# Allegro board StepperNug OSE v1.brd
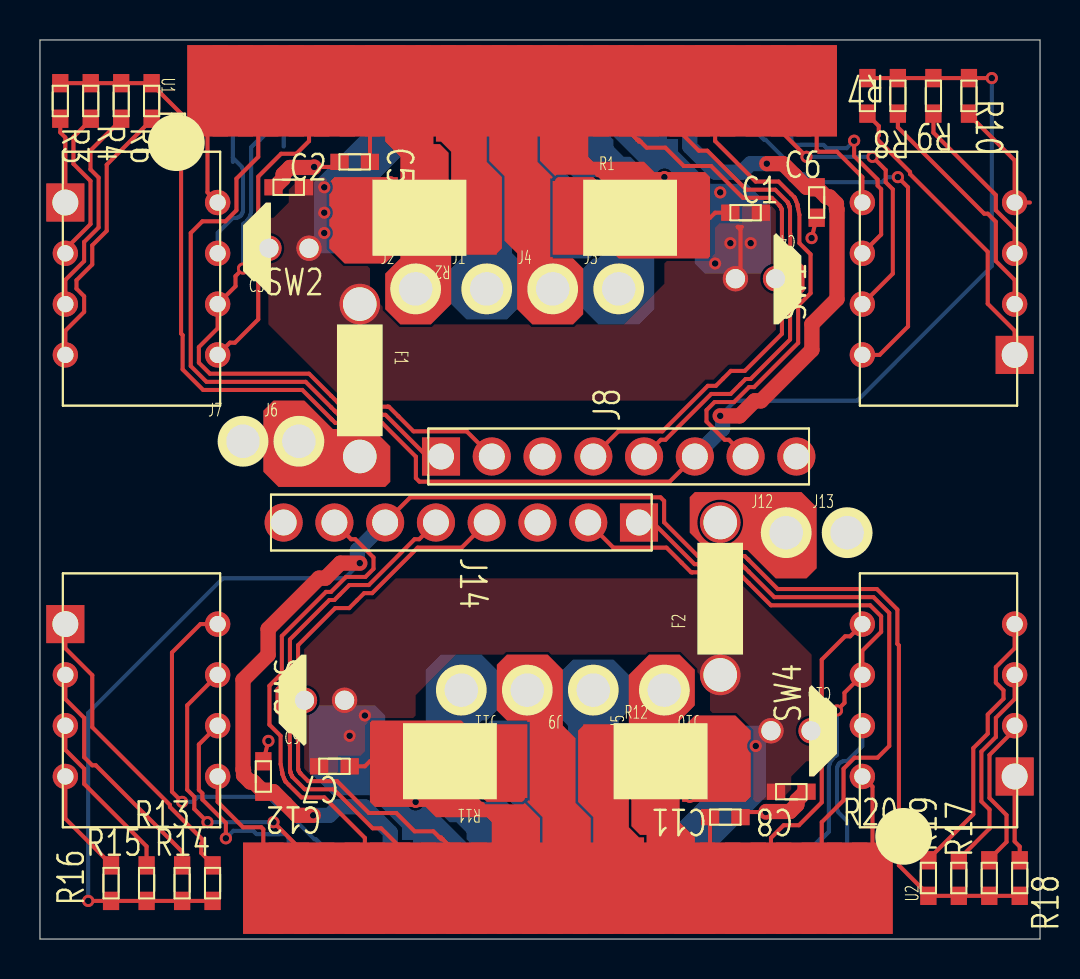
[diagram p0: board, top side]
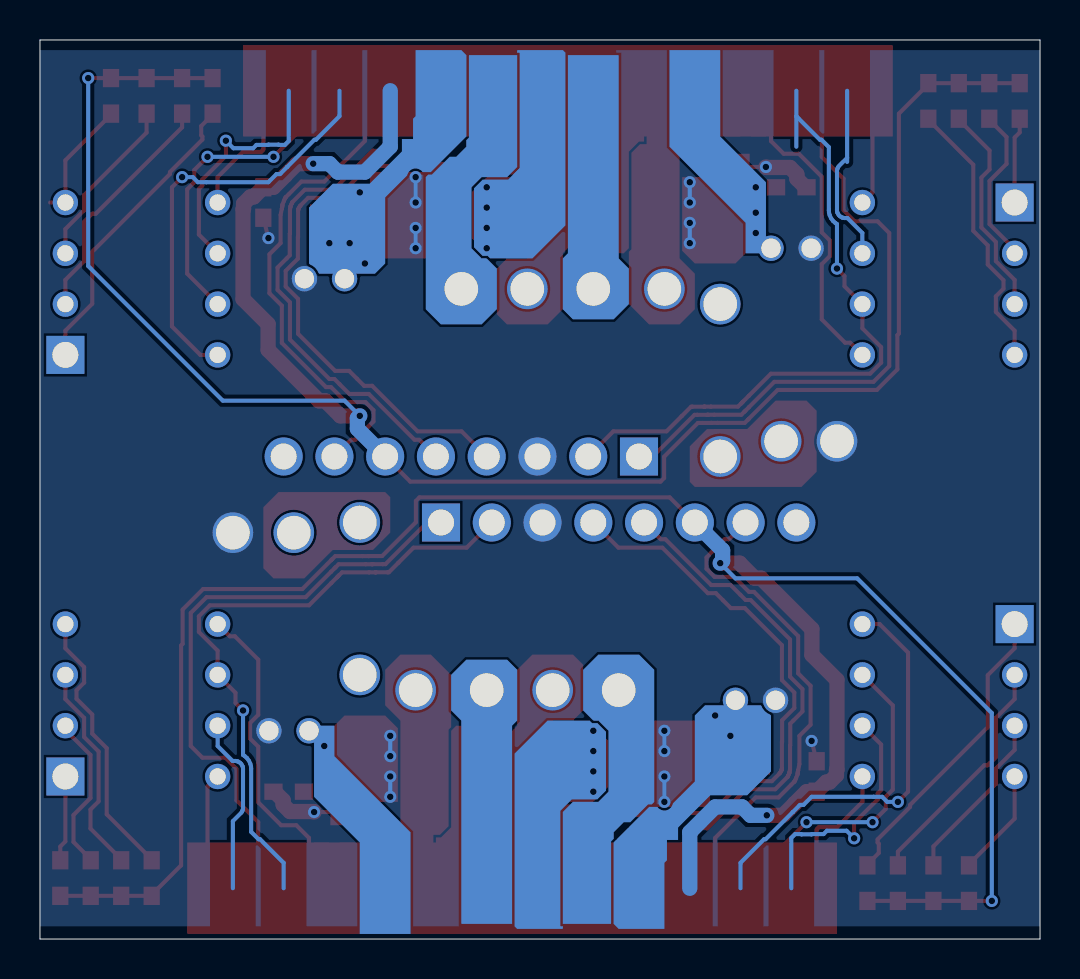
[diagram p1: board, bottom side, seen from below]

Outline 50.04 x 44.96 mm; copper layers: TOP, BOTTOM. Coordinates in mm from the lower left corner of the outline.
Outline path: 0,44.96 50.04,44.96 50.04,0 0,0 0,44.96

## Placement (name value [footprint] x y rotation side)
C1  1u  [SMD_0603_CAP]  35.31 36.32 0 top
C2  1u  [SMD_0603_CAP]  12.45 37.59 0 top
C3  47u  [THRU_ELECTRO]  12.45 34.54 0 top
C4  47u  [THRU_ELECTRO]  35.81 33.02 180 top
C5  330pf  [SMD_0603_CAP]  15.75 38.86 0 top
C6  2.2uf  [SMD_0603_CAP]  38.86 36.83 90 top
C7  1u  [SMD_0603_CAP]  14.73 8.64 180 top
C8  1u  [SMD_0603_CAP]  37.59 7.37 180 top
C9  47u  [THRU_ELECTRO]  14.22 11.94 0 top
C10  47u  [THRU_ELECTRO]  37.59 10.41 180 top
C11  330pf  [SMD_0603_CAP]  34.29 6.1 180 top
C12  2.2uf  [SMD_0603_CAP]  11.18 8.13 270 top
F1  FUSE  [THRU_FUSE]  16 27.94 270 top
F2  FUSE  [THRU_FUSE]  34.04 17.02 90 top
J1  Wiremount  [WIRE_HOLE]  22.35 32.51 0 top
J2  Wiremount  [WIRE_HOLE]  18.8 32.51 0 top
J3  Wiremount  [WIRE_HOLE]  28.96 32.51 0 top
J4  Wiremount  [WIRE_HOLE]  25.65 32.51 0 top
J5  Wiremount  [WIRE_HOLE]  27.69 12.45 180 top
J6  Wiremount  [WIRE_HOLE]  12.95 24.89 0 top
J7  Wiremount  [WIRE_HOLE]  10.16 24.89 0 top
J8  8 HEADER  [CONN_8SIP]  28.96 24.13 90 top
J9  Wiremount  [WIRE_HOLE]  24.38 12.45 180 top
J10  Wiremount  [WIRE_HOLE]  31.24 12.45 180 top
J11  Wiremount  [WIRE_HOLE]  21.08 12.45 180 top
J12  Wiremount  [WIRE_HOLE]  37.34 20.32 0 top
J13  Wiremount  [WIRE_HOLE]  40.39 20.32 0 top
J14  8 HEADER  [CONN_8SIP]  21.08 20.83 270 top
R1  0.166  [SMD_2512_RES]  26.42 36.07 0 top
R2  0.166  [SMD_2512_RES]  22.1 36.07 180 top
R3  1k  [SMD_0603_RES]  1.02 41.91 270 top
R4  1k  [SMD_0603_RES]  2.54 41.91 270 top
R5  1k  [SMD_0603_RES]  4.06 41.91 270 top
R6  1k  [SMD_0603_RES]  5.59 41.91 270 top
R7  1k  [SMD_0603_RES]  41.4 42.16 270 top
R8  1k  [SMD_0603_RES]  42.93 42.16 270 top
R9  1k  [SMD_0603_RES]  44.7 42.16 270 top
R10  1k  [SMD_0603_RES]  46.48 42.16 270 top
R11  0.166  [SMD_2512_RES]  23.62 8.89 180 top
R12  0.166  [SMD_2512_RES]  27.94 8.89 0 top
R13  1k  [SMD_0603_RES]  7.11 2.79 90 top
R14  1k  [SMD_0603_RES]  8.64 2.79 90 top
R15  1k  [SMD_0603_RES]  5.33 2.79 90 top
R16  1k  [SMD_0603_RES]  3.56 2.79 90 top
R17  1k  [SMD_0603_RES]  47.5 3.05 90 top
R18  1k  [SMD_0603_RES]  49.02 3.05 90 top
R19  1k  [SMD_0603_RES]  45.97 3.05 90 top
R20  1k  [SMD_0603_RES]  44.45 3.05 90 top
SW1  DipSw-4  [DIPSW-4]  44.96 33.02 180 top
SW2  DipSw-4  [DIPSW-4]  5.08 33.02 0 top
SW3  DipSw-4  [DIPSW-4]  5.08 11.94 0 top
SW4  DipSw-4  [DIPSW-4]  44.96 11.94 180 top
U1  TB6560AHQ  [HZIP_25_SMT]  8.38 42.42 0 top
U2  TB6560AHQ  [HZIP_25_SMT]  41.66 2.54 180 top

## Library data of the parts
C1 C2 C5-C8 C11 C12 = C
C3 C4 C9 C10 = C_elect_0
F1 F2 = FUSE_0
J1-J7 J9-J13 = Wiremount
J8 J14 = 8 HEADER
R1-R20 = R
SW1-SW4 = DipSw-4
U1 U2 = TB6560AHQ

## Footprints (pads in the part's own frame, mm; a bottom-side part is the same pattern mirrored in y, then rotated)
CONN_8SIP
  rect 1.905x1.905 hole 1.295: 1(0,8.89)
  round 1.905 hole 1.295: 2(0,6.35) 3(0,3.81) 4(0,1.27) 5(0,-1.27) 6(0,-3.81) 7(0,-6.35) 8(0,-8.89)
DIPSW-4
  rect 1.905x1.905 hole 1.295: 1(-3.81,3.81)
  round 1.27 hole 0.813: 2(-3.81,1.27) 3(-3.81,-1.27) 4(-3.81,-3.81) 5(3.81,-3.81) 6(3.81,-1.27) 7(3.81,1.27) 8(3.81,3.81)
HZIP_25_SMT
  rect 2.032x4.572 smd: 1(0,0) 2(1.27,0) 3(2.54,0) 4(3.81,0) 5(5.08,0) 6(6.35,0) 7(7.62,0) 8(8.89,0) 9(10.16,0) 10(11.43,0) 11(12.7,0) 12(13.97,0) 13(15.24,0) 14(16.51,0) 15(17.78,0) 16(19.05,0) 17(20.32,0) 18(21.59,0) 19(22.86,0) 20(24.13,0) 21(25.4,0) 22(26.67,0) 23(27.94,0) 24(29.21,0) 25(30.48,0)
SMD_0603_CAP
  rect 0.914x0.813 smd: 1(-0.762,0) 2(0.762,0)
SMD_0603_RES
  rect 0.914x0.813 smd: 1(-0.889,0) 2(0.889,0)
SMD_2512_RES
  rect 1.524x3.683 smd: 1(0,0) 2(6.223,0)
THRU_ELECTRO
  round 1.27 hole 0.965: 1(-0.991,0) 2(1.016,0)
THRU_FUSE
  round 2.032 hole 1.676: 1(-3.81,0) 2(3.81,0)
WIRE_HOLE
  round 2.032 hole 1.676: 1(0,0)

## Nets
VCC: C6.2 C12.2 J8.6 J14.6 R3.1 R4.1 R5.1 R6.1 R7.1 R8.1 R9.1 R10.1 R13.1 R14.1 R15.1 R16.1 R17.1 R18.1 R19.1 R20.1 U1.20(VDD) U2.20(VDD)
0: C1.1 C2.1 C3.1(-) C4.1(-) C5.1 C6.1 C7.1 C8.1 C9.1(-) C10.1(-) C11.1 C12.1 J7.1(.) J8.3 J13.1(.) J14.3 R1.2 R2.2 R11.2 R12.2 U1.6(SGND) U1.10(MOTGND#10) U1.15(MOTGND#15) U2.6(SGND) U2.10(MOTGND#10) U2.15(MOTGND#15)
VMOT: F1.2 F2.2 J6.1(.) J12.1(.)
N21631: R1.1 U1.14(A_CRNT_SNS)
N21711: J1.1(.) U1.12(OUT_BP)
N21715: J4.1(.) U1.13(OUT_AM)
N21719: J3.1(.) U1.16(OUT_AP)
N21723: J2.1(.) U1.9(OUT_BM)
N21813: C1.2 C2.2 C3.2(+) C4.2(+) F1.1 U1.8(VMB) U1.18(VMA)
N21925: J8.1 U1.3(CLK)
N21937: J8.7 U1.21(DIR)
N21949: J8.4 U1.17(MO)
N21961: J8.5 U1.19(PROTECT)
N22033: SW2.8(IN1) U1.1(TQ2)
N22045: SW2.7(IN2) U1.2(TQ1)
N22057: J8.2 SW2.6(IN3) U1.4(ENA)
N22069: SW2.5(IN4) U1.5(RES)
N22081: SW1.5(IN4) U1.25(DCY1)
N22089: SW1.8(IN1) U1.22(M2)
N22289: R7.2 SW1.1(TRM1)
N22293: R8.2 SW1.2(TRM2)
N22297: R9.2 SW1.3(TRM3)
N22301: R10.2 SW1.4(TRM4)
N22309: SW1.6(IN3) U1.24(DCY2)
N22321: SW1.7(IN2) U1.23(M1)
N23844: R11.1 U2.14(A_CRNT_SNS)
N23930: J5.1(.) U2.12(OUT_BP)
N23944: J9.1(.) U2.13(OUT_AM)
N23948: J11.1(.) U2.16(OUT_AP)
N23952: J10.1(.) U2.9(OUT_BM)
N24042: C7.2 C8.2 C9.2(+) C10.2(+) F2.1 U2.8(VMB) U2.18(VMA)
N24154: J14.1 U2.3(CLK)
N24166: J14.7 U2.21(DIR)
N24170: J14.4 U2.17(MO)
N24190: J14.5 U2.19(PROTECT)
N24262: SW4.8(IN1) U2.1(TQ2)
N24274: SW4.7(IN2) U2.2(TQ1)
N24286: J14.2 SW4.6(IN3) U2.4(ENA)
N24298: SW4.5(IN4) U2.5(RES)
N24310: SW3.5(IN4) U2.25(DCY1)
N24318: SW3.8(IN1) U2.22(M2)
N24518: R14.2 SW3.1(TRM1)
N24522: R13.2 SW3.2(TRM2)
N24526: R15.2 SW3.3(TRM3)
N24530: R16.2 SW3.4(TRM4)
N24538: SW3.6(IN3) U2.24(DCY2)
N24550: SW3.7(IN2) U2.23(M1)
N26771: R2.1 U1.11(B_CRNT_SNS)
N26877: R12.1 U2.11(B_CRNT_SNS)
N216076: C5.2 U1.7(OSC)
N221410: R3.2 SW2.1(TRM1)
N221411: R4.2 SW2.2(TRM2)
N221412: R5.2 SW2.3(TRM3)
N221413: R6.2 SW2.4(TRM4)
N238366: C11.2 U2.7(OSC)
N243700: R18.2 SW4.1(TRM1)
N243701: R17.2 SW4.2(TRM2)
N243702: R19.2 SW4.3(TRM3)
N243703: R20.2 SW4.4(TRM4)

Pads without a net: J8 8; J14 8

## Via types
v1: diameter 0.61, hole 0.33, TOP to BOTTOM, 54 vias

## Routing (per net, layer and track width the routed paths; a pad name or vN(x,y) marks a point on that pad's centre or on a via; arc(x,y) is an arc through that point)
VCC: length 218.2
  TOP w0.203: J14.6 18.53,22.09 31.05,22.09 31.23,21.91 31.23,20.84 32.92,19.15 33.15,19.15 33.55,19.15 33.56,19.15 33.59,19.15 33.91,19.15 33.91,19.15 35.26,19.15 35.41,19 35.46,18.95 36.91,17.5 41.87,17.5 42.9,16.47 42.9,14.76 42.98,14.68 42.98,3.68 44.45,2.21 R20.1 R19.1 R17.1 R18.1 ; 46.48,43 R10.1 ; R10.1 v1(47.62,43.05) ; R10.1 R9.1 R8.1 R7.1 ; v1(2.41,1.91) R16.1 R15.1 R13.1 R14.1 ; J8.6 31.51,22.87 18.99,22.87 18.81,23.05 18.81,24.12 17.12,25.81 16.89,25.81 16.48,25.81 16.48,25.81 16.45,25.81 16.13,25.81 16.13,25.81 14.78,25.81 14.63,25.96 14.57,26.01 13.13,27.46 8.16,27.46 7.14,28.48 7.14,30.2 7.06,30.28 7.06,41.28 5.59,42.75 R6.1 R5.1 R4.1 R3.1
  TOP w0.762: v1(16,18.8) 15.03,18.8 14.28,18.05 13.96,18.05 11.42,15.5 11.42,14.21 10.16,12.95 10.16,8.47 10.19,8.44 10.19,8.19 10.53,7.85 10.69,7.85 C12.2 11.68,7.37 12.27,6.78 12.27,6.78 12.86,6.19 v1(13.67,6.19) ; v1(36.37,38.77) 37.18,38.77 37.77,38.18 37.77,38.18 38.35,37.59 C6.2 39.34,37.11 39.51,37.11 39.85,36.77 39.85,36.51 39.88,36.49 39.88,32 38.62,30.75 38.62,29.46 36.08,26.91 35.76,26.91 35.01,26.16 v1(34.04,26.16)
  BOTTOM w0.203: v1(47.62,43.05) 47.62,33.66 40.89,26.92 34.8,26.92 v1(34.04,26.16) ; v1(16,18.8) 15.24,18.03 9.14,18.03 2.41,11.3 v1(2.41,1.91)
  BOTTOM w0.762: v1(16,18.8) 15.88,18.92 15.88,19.44 J14.6 ; U2.20 17.53,5.33 16.26,6.6 14.9,6.6 14.48,6.19 v1(13.67,6.19) ; J8.6 34.16,25.52 34.16,26.04 v1(34.04,26.16) ; U1.20 32.51,39.62 33.78,38.35 35.14,38.35 35.55,38.77 v1(36.37,38.77)
0: length 31.1
  TOP w0.203: C5.1 14.94,38.86 14.68,38.61 v1(13.72,38.61) ; v1(31.24,36.83) 31.24,35.66 ; 31.24,35.66 v1(31.24,35.56) v1(31.24,34.54) ; 31.24,35.66 31.65,36.07 R1.2 33.53,36.07 33.78,36.32 C1.1 ; C7.1 16.26,8.64 16.51,8.89 R11.2 18.39,8.89 18.8,9.3 ; C11.1 35.1,6.1 35.36,6.35 v1(36.32,6.35) ; v1(18.8,10.41) v1(18.8,9.4) ; C12.1 v1(11.43,9.91) ; C6.1 v1(38.61,35.05) ; v1(32.51,8.13) v1(32.51,9.14) ; v1(17.53,36.83) v1(17.53,35.81)
  TOP w0.762: v1(13.72,38.61) 13.69,38.58 12.51,38.58 12.17,38.24 12.17,38.02 11.74,37.59 C2.1 ; v1(36.32,6.35) 36.35,6.38 37.53,6.38 37.87,6.72 37.87,6.94 38.3,7.37 C8.1
  BOTTOM w0.203: v1(31.24,35.56) v1(31.24,34.54) ; v1(17.53,37.85) v1(17.53,36.83) ; v1(18.8,9.4) v1(18.8,10.41) ; v1(32.51,9.14) v1(32.51,10.16) ; v1(31.24,36.83) v1(31.24,38.1) ; v1(32.51,7.11) v1(32.51,8.13) ; v1(17.53,35.81) v1(17.53,34.8) ; v1(18.8,8.13) v1(18.8,6.86)
N21631: length 4.7
  TOP w0.203: v1(27.69,37.59) v1(27.69,36.58) 27.69,36.35 27.41,36.07 R1.1 ; v1(27.69,35.56) v1(27.69,34.54)
  BOTTOM w0.203: v1(27.69,36.58) v1(27.69,35.56)
N21813: length 8
  TOP w0.203: 35.05,33.27 35.05,35.47 34.91,35.61 35.13,35.61
  BOTTOM w0.203: C3.2 v1(14.22,35.31) 13.97,35.31 ; v1(33.78,33.78) 34.8,34.8 35.05,34.8 ; 36.32,36.32 C1.2 v1(34.54,34.8)
  vias: v1(14.22,37.59) v1(14.22,36.32) v1(34.04,37.34) v1(35.56,34.8)
N21925: length 30.2
  TOP w0.203: J8.1 19.37,24.13 17.29,26.21 17.14,26.21 17.14,26.21 16.65,26.21 16.65,26.21 16.61,26.21 16.61,26.22 16.3,26.22 14.95,26.22 14.8,26.37 14.79,26.37 14.74,26.42 14.57,26.59 13.29,27.86 8.33,27.86 7.54,28.65 7.54,35.31 8.13,35.89 9.28,35.89 9.83,36.44 9.83,38.02 10.92,39.12 U1.3
N21937: length 24.7
  TOP w0.203: U1.21 33.78,39.9 35.81,37.88 36.96,37.88 37.59,37.24 37.74,37.09 37.75,37.08 37.77,37.05 37.78,37.03 37.81,36.96 37.83,36.91 37.83,36.9 37.9,36.73 37.91,36.7 37.91,36.67 37.92,36.59 38,36.21 38,34.8 38.56,34.24 38.56,32.29 37.94,31.67 37.94,29.81 35.73,27.6 35.47,27.6 34.73,26.85 33.76,26.85 33.35,26.45 33.35,25.88 34.26,24.97 34.47,24.97 J8.7
N21949: length 30.6
  TOP w0.203: 29.88,39.97 29.97,39.88 30.05,39.88 ; 29.88,39.97 28.7,41.15 U1.17 ; 29.88,39.97 29.96,39.97 30.05,39.88 ; J8.4 28.94,25.39 31.14,25.39 33.42,27.66 33.82,27.66 34.18,28.02 34.57,28.41 35.27,28.41 37.12,30.27 37.12,32.01 37.74,32.63 37.74,33.41 37.13,34.02 37.13,35.1 37.12,35.11 37.12,36.44 37.12,36.45 37.12,36.45 37.11,36.5 37.11,36.51 37.08,36.57 37.04,36.63 37.02,36.65 37,36.68 37,36.68 36.62,37.07 35.17,37.07 33.58,38.66 32.21,38.66 31.29,39.57 30.35,39.57 30.05,39.88
N21961: length 26.4
  TOP w0.203: U1.19 31.24,41.15 32.97,39.42 33.39,39.42 35.34,37.47 36.79,37.47 37.4,36.85 37.41,36.85 37.42,36.81 37.44,36.78 37.45,36.76 37.49,36.67 37.5,36.64 37.5,36.62 37.5,36.62 37.52,36.52 37.53,36.48 37.53,35.28 37.54,35.27 37.54,34.19 37.69,34.03 38.15,33.58 38.15,32.46 37.53,31.84 37.53,29.98 35.56,28.01 35.31,28.01 35.05,27.75 34.56,27.26 33.59,27.26 31.29,24.97 31.06,24.97 J8.5
N22033: length 5.8
  TOP w0.203: U1.1 8.38,37.34 SW2.8
N22045: length 9.2
  BOTTOM w0.203: 9.65,39.06 10.07,38.65 10.11,38.58 10.14,38.51 10.16,38.43 10.16,36.45 10.16,36.4 10.14,36.32 10.1,36.25 10.05,36.19 9.99,36.13 9.93,36.09 9.85,36.07 9.77,36.05 9.64,36.05 8.89,35.31 SW2.7 ; 9.65,39.06 U1.2 ; 9.65,39.06 9.65,38.86
N22057: length 33.5
  TOP w0.203: v1(10.16,33.53) 9.78,33.15 9.78,32.64 SW2.6 8.89,30.54 7.95,29.6 7.95,28.82 8.5,28.27 13.46,28.27 14.57,27.16 14.86,26.88 14.91,26.82 14.96,26.77 14.96,26.77 15.11,26.62 16.47,26.62 16.78,26.62 16.78,26.62 16.82,26.62 17.39,26.62 17.46,26.62 17.93,26.14 18.69,25.39 21.35,25.39 J8.2
  BOTTOM w0.203: v1(10.16,33.53) 10.16,35.76 10.24,35.8 10.36,35.91 10.45,36.04 10.52,36.18 10.56,36.34 10.57,36.44 10.57,39.6 10.94,39.97 11.01,39.97 12.19,41.15 ; 12.19,39.62 12.19,41.15 ; 12.19,41.15 U1.4
N22069: length 16
  TOP w0.203: U1.5 13.46,39.9 12.83,39.27 12.07,39.27 10.92,38.12 10.92,35.34 10.52,34.93 10.52,34.15 10.92,33.75 10.92,30.99 9.75,29.82 9.5,29.82 SW2.5
N22081: length 7.1
  TOP w0.203: SW1.5 41.15,38.1 39.88,39.37 38.96,39.37 38.86,39.47 U1.25
N22089: length 21.2
  TOP w0.203: v1(42.93,38.1) 43.43,37.59 43.43,30.63 42.01,29.21 SW1.8
  BOTTOM w0.203: v1(42.93,38.1) 42.39,38.1 42.14,37.85 41.72,37.85 41.72,37.85 38.61,37.85 38.2,38.25 38.02,38.25 37.67,38.61 36.31,39.97 36.23,39.97 35.05,41.15 U1.22
N22289: length 15.2
  TOP w0.203: R7.2 41.4,41.22 41.97,40.66 41.97,40.19 41.91,40.13 41.91,39.98 43.54,38.35 43.54,38.25 47.42,34.37 47.42,31.77 48.77,30.42 SW1.1
N22293: length 12
  TOP w0.203: R8.2 42.93,40.59 47.24,36.27 47.42,36.27 47.83,35.87 47.83,33.9 48.77,32.96 SW1.2
N22297: length 8.7
  TOP w0.203: R9.2 44.7,40.33 47.83,37.2 47.83,36.44 48.77,35.5 SW1.3
N22301: length 6.2
  TOP w0.203: 49.53,36.83 SW1.4 48.77,38.94 46.48,41.22 R10.2
N22309: length 12.6
  TOP w0.203: SW1.6 42.09,35.23 42.09,37.5 41.91,37.68 41.91,37.98 40.74,39.15 v1(40.74,39.92)
  BOTTOM w0.203: v1(40.74,39.92) 40.36,39.54 39.37,39.54 39.21,39.71 38.62,39.71 38.61,39.73 38.1,39.73 38.09,39.71 37.78,39.71 37.59,39.9 U1.24
N22321: length 16
  TOP w0.203: SW1.7 42.67,33.27 42.67,37.49 42.32,37.85 42.32,38.46 v1(41.66,39.12) ; 38.46,39.01 v1(38.35,39.12) 36.32,41.15 U1.23
  BOTTOM w0.203: v1(41.66,39.12) v1(38.35,39.12)
N23844: length 4.7
  TOP w0.203: v1(22.35,7.37) v1(22.35,8.38) 22.35,8.61 22.63,8.89 R11.1 ; v1(22.35,9.4) v1(22.35,10.41)
  BOTTOM w0.203: v1(22.35,8.38) v1(22.35,9.4)
N24042: length 1.1
  BOTTOM w0.203: C10.2 v1(35.81,9.65)
  vias: v1(15.49,10.16) v1(16.26,11.18)
N24154: length 30.2
  TOP w0.203: U2.3 39.12,5.84 40.21,6.93 40.21,8.52 40.76,9.07 41.91,9.07 42.49,9.65 42.49,16.31 41.71,17.09 36.74,17.09 35.46,18.37 35.3,18.54 35.24,18.59 35.24,18.59 35.09,18.74 33.74,18.74 33.42,18.74 33.42,18.74 33.39,18.74 33.39,18.74 32.89,18.74 32.89,18.75 32.75,18.75 30.67,20.83 J14.1
N24166: length 24.7
  TOP w0.203: U2.21 16.26,5.05 14.23,7.08 13.08,7.08 12.45,7.72 12.3,7.86 12.29,7.88 12.27,7.91 12.26,7.93 12.22,8 12.2,8.05 12.2,8.06 12.13,8.23 12.13,8.25 12.13,8.29 12.12,8.37 12.04,8.75 12.04,10.16 11.48,10.72 11.48,12.66 12.1,13.28 12.1,15.15 14.31,17.36 14.56,17.36 15.31,18.11 16.28,18.11 16.69,18.51 16.69,19.08 15.78,19.99 15.57,19.99 J14.7
N24170: length 30.6
  TOP w0.203: 19.99,5.08 19.68,5.38 18.75,5.38 17.83,6.3 16.46,6.3 14.87,7.89 13.42,7.89 13.03,8.28 13.03,8.28 13.01,8.31 13,8.33 12.96,8.39 12.93,8.45 12.93,8.46 12.92,8.5 12.92,8.51 12.91,8.52 12.91,9.85 12.9,9.86 12.9,10.94 12.29,11.55 12.29,12.33 12.91,12.95 12.91,14.69 14.77,16.55 15.47,16.55 15.86,16.94 16.22,17.29 16.62,17.29 18.9,19.57 21.09,19.57 J14.4 ; 19.99,5.08 20.07,5.08 20.16,4.99 ; 19.99,5.08 20.08,4.99 20.16,4.99 ; 20.16,4.99 21.34,3.81 U2.17
N24190: length 26.4
  TOP w0.203: U2.19 18.8,3.81 17.07,5.54 16.65,5.54 14.7,7.49 13.25,7.49 12.63,8.1 12.63,8.11 12.61,8.15 12.6,8.18 12.59,8.19 12.55,8.29 12.54,8.32 12.54,8.34 12.53,8.34 12.52,8.44 12.51,8.48 12.51,9.68 12.5,9.69 12.5,10.77 12.34,10.92 11.89,11.38 11.89,12.5 12.51,13.12 12.51,14.98 14.48,16.95 14.73,16.95 14.99,17.21 15.48,17.7 16.45,17.7 18.74,19.99 18.98,19.99 J14.5
N24262: length 5.8
  TOP w0.203: U2.1 41.66,7.62 SW4.8
N24274: length 9
  BOTTOM w0.203: SW4.7 41.15,9.65 40.4,8.9 40.27,8.9 40.19,8.89 40.11,8.87 40.04,8.83 39.98,8.77 39.94,8.71 39.9,8.64 39.88,8.56 39.88,8.51 39.88,6.53 39.89,6.45 39.92,6.38 39.97,6.31 40.39,5.89 U2.2
N24286: length 32
  TOP w0.203: J14.2 28.69,19.57 31.35,19.57 32.11,18.81 32.58,18.34 32.64,18.34 33.22,18.34 33.25,18.34 33.26,18.34 33.57,18.34 34.92,18.34 35.07,18.19 35.08,18.19 35.18,18.08 35.46,17.8 36.57,16.69 41.54,16.69 42.09,16.14 42.09,15.36 41.15,14.42 SW4.6 40.26,12.32 40.26,11.81 v1(39.88,11.43)
  BOTTOM w0.203: U2.4 37.85,3.81 39.02,4.99 39.1,4.99 39.47,5.36 39.47,8.52 39.48,8.62 39.52,8.78 39.59,8.92 39.68,9.05 39.8,9.15 39.88,9.2 v1(39.88,11.43)
N24298: length 16
  TOP w0.203: U2.5 36.58,5.05 37.21,5.69 37.97,5.69 39.12,6.83 39.12,9.62 39.52,10.02 39.52,10.8 39.12,11.21 39.12,13.97 40.28,15.14 40.54,15.14 SW4.5
N24310: length 7.1
  TOP w0.203: SW3.5 8.89,6.86 10.16,5.59 11.07,5.59 11.18,5.49 U2.25
N24318: length 21.2
  TOP w0.203: SW3.8 8.03,15.75 6.6,14.33 6.6,7.37 v1(7.11,6.86)
  BOTTOM w0.203: v1(7.11,6.86) 7.65,6.86 7.9,7.11 8.32,7.11 8.32,7.11 11.43,7.11 11.84,6.71 12.01,6.71 12.37,6.35 13.73,4.99 13.81,4.99 14.99,3.81 U2.22
N24518: length 15.2
  TOP w0.203: R14.2 8.64,3.73 8.07,4.3 8.07,4.77 8.13,4.83 8.13,4.98 6.5,6.61 6.5,6.71 2.62,10.59 2.62,13.19 1.27,14.54 SW3.1
N24522: length 12
  TOP w0.203: SW3.2 1.27,12 2.21,11.06 2.21,9.09 2.62,8.69 2.8,8.69 7.11,4.37 R13.2
N24526: length 8.7
  TOP w0.203: R15.2 5.33,4.63 2.21,7.76 2.21,8.52 1.27,9.46 SW3.3
N24530: length 5.4
  TOP w0.203: R16.2 3.56,3.73 1.27,6.02 SW3.4
N24538: length 12.6
  TOP w0.203: SW3.6 7.95,9.73 7.95,7.46 8.13,7.28 8.13,6.98 9.3,5.8 v1(9.3,5.04)
  BOTTOM w0.203: v1(9.3,5.04) 9.68,5.41 10.66,5.41 10.83,5.25 11.42,5.25 11.43,5.23 11.94,5.23 11.95,5.25 12.25,5.25 12.45,5.05 U2.24
N24550: length 15.9
  TOP w0.203: U2.23 13.72,3.81 v1(11.68,5.84) ; SW3.7 7.37,11.68 7.37,7.47 7.72,7.11 7.72,6.5 v1(8.38,5.84)
  BOTTOM w0.203: v1(8.38,5.84) v1(11.68,5.84)
N216076: length 3.8
  TOP w0.203: U1.7 16.51,41.91 C5.2
N221410: length 4.3
  TOP w0.203: SW2.1 1.27,40.08 1.02,40.34 R3.2
N221411: length 8
  TOP w0.203: R4.2 2.54,40.97 1.68,40.11 1.68,38.76 2.53,37.91 2.53,35.75 1.27,34.49 SW2.2
N221412: length 10.8
  TOP w0.203: R5.2 4.06,40.97 2.53,39.43 2.53,38.48 2.93,38.08 2.93,35.58 2.21,34.86 2.21,33.9 1.27,32.96 SW2.3
N221413: length 13.9
  TOP w0.203: R6.2 5.59,40.97 3.34,38.72 3.34,35.41 2.62,34.69 2.62,33.73 1.83,32.94 1.83,32.52 2.21,32.14 2.21,31.36 1.27,30.42 SW2.4
N238366: length 3.8
  TOP w0.203: C11.2 33.53,3.05 U2.7
N243700: length 4.3
  TOP w0.203: SW4.1 48.77,4.88 49.02,4.62 R18.2
N243701: length 8
  TOP w0.203: SW4.2 48.77,10.46 47.51,9.21 47.51,7.05 48.36,6.2 48.36,4.85 47.5,3.99 R17.2
N243702: length 10.8
  TOP w0.203: R19.2 45.97,3.99 47.51,5.52 47.51,6.47 47.1,6.88 47.1,9.38 47.83,10.1 47.83,11.06 48.77,12 SW4.3
N243703: length 13.9
  TOP w0.203: R20.2 44.45,3.99 46.7,6.24 46.7,9.54 47.42,10.27 47.42,11.23 48.21,12.01 48.21,12.44 47.83,12.82 47.83,13.6 48.77,14.54 SW4.4

## Copper pours and planes (outline as drawn; the poured copper is in the pictures)
(no net) on TOP: 25.65,34.29 27.69,34.29 28.45,35.05 28.45,37.34 27.69,38.1 25.91,38.1 25.65,37.85
(no net) on TOP: 38.35,18.03 34.8,18.03 32.51,20.32 32.51,22.1 32.77,22.35 38.1,22.35 38.86,21.59 38.86,18.54
(no net) on TOP: 11.68,26.92 15.24,26.92 17.53,24.64 17.53,22.86 17.27,22.61 11.94,22.61 11.18,23.37 11.18,26.42
(no net) on TOP: 18.03,38.1 14.73,38.1 14.48,37.85 14.48,34.54 15.24,33.78 17.27,33.78 18.03,34.54
(no net) on TOP: 23.37,14.22 25.4,14.22 26.16,13.46 26.16,10.67 26.92,9.91 26.92,6.86 27.69,6.1 27.69,0.76 25.15,0.76 25.15,6.1 24.38,6.86 24.38,10.92 23.37,10.92 22.86,11.43 22.86,13.72
(no net) on TOP: 26.67,30.73 24.64,30.73 23.88,31.5 23.88,34.29 23.11,35.05 23.11,38.1 22.35,38.86 22.35,44.2 24.89,44.2 24.89,38.86 25.65,38.1 25.65,34.04 26.67,34.04 27.18,33.53 27.18,31.24
(no net) on TOP: 32,6.86 35.31,6.86 35.56,7.11 35.56,10.41 34.8,11.18 32.77,11.18 32,10.41
(no net) on TOP: 24.38,10.67 22.35,10.67 21.59,9.91 21.59,7.62 22.35,6.86 24.13,6.86 24.38,7.11
(no net) on TOP: 32.77,0.76 32.77,5.08 32,5.84 32,10.92 32.77,11.68 32.77,13.46 32,14.22 30.48,14.22 29.46,13.21 29.46,5.59 30.23,4.83 30.23,0.76
(no net) on TOP: 27.18,10.67 29.21,10.67 29.46,10.41 29.46,5.59 29.97,5.08 30.23,5.08 30.23,0.76 27.69,0.76 27.69,6.1 26.92,6.86 26.92,10.41
(no net) on TOP: 24.89,44.2 24.89,38.86 25.65,38.1 27.94,38.1 28.45,37.59 28.45,34.54 28.96,34.04 33.53,34.04 33.53,38.1 33.27,38.35 30.73,38.35 30.23,38.86 27.69,38.86 27.43,39.12 27.43,44.2
(no net) on TOP: 17.27,44.2 17.27,39.88 18.03,39.12 18.03,34.04 17.27,33.27 17.27,31.5 18.03,30.73 19.56,30.73 20.57,31.75 20.57,39.37 19.81,40.13 19.81,44.2
(no net) on TOP: 22.86,34.29 20.83,34.29 20.57,34.54 20.57,39.37 20.07,39.88 19.81,39.88 19.81,44.2 22.35,44.2 22.35,38.86 23.11,38.1 23.11,34.54
(no net) on TOP: 25.15,0.76 25.15,6.1 24.38,6.86 22.1,6.86 21.59,7.37 21.59,10.41 21.08,10.92 16.51,10.92 16.51,6.86 16.76,6.6 19.3,6.6 19.81,6.1 22.35,6.1 22.61,5.84 22.61,0.76
(no net) on BOTTOM: 23.62,44.2 23.62,35.81 25.4,34.04 27.94,34.04 28.45,34.54 28.45,37.59 27.94,38.1 26.67,38.1 26.16,38.61 26.16,44.45 23.88,44.45
(no net) on BOTTOM: 16,44.45 18.54,44.45 18.54,39.62 14.73,35.81 14.73,34.29 13.97,34.29 13.72,34.54 13.72,37.85 16,40.13
(no net) on BOTTOM: 28.7,44.2 28.7,40.13 30.48,38.35 31.5,38.35 32.77,37.08 32.77,33.78 33.27,33.27 36.07,33.27 36.58,33.78 36.58,36.58 34.8,38.35 34.04,38.35 31.24,41.15 31.24,44.45 28.96,44.45
(no net) on BOTTOM: 21.08,44.2 21.08,34.04 20.57,33.53 20.57,31.75 21.34,30.99 23.37,30.99 23.88,31.5 23.88,34.04 23.62,34.29 23.62,44.2
(no net) on BOTTOM: 28.96,0.76 28.96,10.92 29.46,11.43 29.46,13.21 28.7,13.97 26.67,13.97 26.16,13.46 26.16,10.92 26.42,10.67 26.42,0.76
(no net) on BOTTOM: 34.04,0.25 31.5,0.25 31.5,5.33 35.31,9.14 35.31,10.67 36.07,10.67 36.32,10.41 36.32,7.11 34.04,4.83
(no net) on BOTTOM: 26.42,0.76 26.42,9.14 24.64,10.92 22.1,10.92 21.59,10.41 21.59,7.37 22.1,6.86 23.37,6.86 23.88,6.35 23.88,0.51 26.16,0.51
(no net) on BOTTOM: 29.97,30.73 27.94,30.73 27.18,31.5 27.18,33.53 27.69,34.04 27.94,34.04 28.45,34.54 28.45,37.59 27.94,38.1 26.67,38.1 26.16,38.61 26.16,44.2 28.7,44.2 28.7,39.62 29.21,39.12 29.72,39.12 30.73,38.1 30.73,31.5
(no net) on BOTTOM: 20.07,14.22 22.1,14.22 22.86,13.46 22.86,11.43 22.35,10.92 22.1,10.92 21.59,10.41 21.59,7.37 22.1,6.86 23.37,6.86 23.88,6.35 23.88,0.76 21.34,0.76 21.34,5.33 20.83,5.84 20.32,5.84 19.3,6.86 19.3,13.46
(no net) on BOTTOM: 21.34,0.76 21.34,4.83 19.56,6.6 18.54,6.6 17.27,7.87 17.27,11.18 16.76,11.68 13.97,11.68 13.46,11.18 13.46,8.38 15.24,6.6 16,6.6 18.8,3.81 18.8,0.51 21.08,0.51
0 on TOP (solid shape): 35.56,10.41 35.56,10 35.38,9.65 35.56,9.3 35.56,7.11 35.31,6.86 32.13,6.86 32.13,10.54 32.77,11.18 34.8,11.18
0 on TOP (solid shape): 21.59,10.41 21.59,10.09 21.46,9.96 21.46,7.57 21.59,7.44 21.59,7.37 22.1,6.86 22.17,6.86 22.3,6.73 24.18,6.73 24.26,6.8 25.02,6.04 25.02,0.76 22.61,0.76 22.61,5.84 22.35,6.1 19.81,6.1 19.3,6.6 17.96,6.6 16.76,6.6 16.51,6.86 16.51,10.83 16.56,10.87 16.61,10.92 21.08,10.92
0 on TOP (solid shape): 27.43,39.12 27.69,38.86 30.23,38.86 30.73,38.35 32.08,38.35 33.27,38.35 33.53,38.1 33.53,34.13 33.48,34.09 33.43,34.04 28.96,34.04 28.45,34.54 28.45,34.87 28.58,35 28.58,37.39 28.45,37.52 28.45,37.59 27.94,38.1 27.87,38.1 27.74,38.23 25.86,38.23 25.78,38.15 25.02,38.91 25.02,44.2 27.43,44.2
0 on TOP (solid shape): 17.91,34.42 17.27,33.78 15.24,33.78 14.48,34.54 14.48,34.96 14.66,35.31 14.48,35.66 14.48,35.97 14.66,36.32 14.48,36.67 14.48,37.24 14.65,37.56 14.53,37.9 14.73,38.1 17.91,38.1
0 on BOTTOM: 0,0.64 0,44.45 50.04,44.45 50.04,0.64
VMOT on TOP (solid shape): 14.45,25.71 14.65,25.5 16,25.5 16.32,25.5 16.36,25.5 16.66,25.5 17.53,24.64 17.53,22.86 17.27,22.61 11.94,22.61 11.18,23.37 11.18,24.37 11.3,24.89 11.18,25.42 11.18,26.42 11.68,26.92 13.23,26.92
N21631 on TOP (solid shape): 28.45,37.34 28.45,35.05 27.69,34.29 25.78,34.29 25.78,37.97 25.91,38.1 27.69,38.1
N21631 on BOTTOM (solid shape): 26.16,44.32 26.03,44.32 26.03,38.56 26.62,37.97 27.89,37.97 28.32,37.54 28.32,34.6 27.89,34.16 27.63,34.16 27.51,34.04 25.4,34.04 23.75,35.69 23.75,44.32 23.88,44.45 26.16,44.45
N21711 on BOTTOM (solid shape): 23.62,34.29 23.88,34.04 23.88,31.5 23.37,30.99 21.34,30.99 20.57,31.75 20.57,33.53 21.08,34.04 21.08,44.2 23.62,44.2
N21715 on TOP (solid shape): 24.89,38.86 25.63,38.12 25.64,38.07 25.59,38.04 25.53,38.04 25.53,34.1 25.65,34.1 25.65,34.04 26.67,34.04 27.18,33.53 27.18,31.24 26.67,30.73 24.64,30.73 23.88,31.5 23.88,34.29 23.24,34.92 23.24,38.15 22.48,38.91 22.48,44.2 24.89,44.2
N21719 on BOTTOM (solid shape): 28.57,40.08 28.7,39.95 28.7,39.62 29.21,39.12 29.54,39.12 30.43,38.23 30.61,38.23 30.73,38.1 30.73,31.5 29.97,30.73 27.94,30.73 27.18,31.5 27.18,33.53 27.69,34.04 27.94,34.04 28.45,34.54 28.45,37.59 27.94,38.1 26.67,38.1 26.16,38.61 26.16,44.2 28.57,44.2
N21723 on TOP (solid shape): 19.68,39.75 20.01,39.75 20.45,39.32 20.45,34.49 20.57,34.36 20.57,31.75 19.56,30.73 18.03,30.73 17.27,31.5 17.27,33.27 18.03,34.04 18.03,39.12 17.27,39.88 17.27,44.2 19.68,44.2
N21813 on BOTTOM (solid shape): 18.54,39.62 14.73,35.81 14.73,34.29 13.97,34.29 13.72,34.54 13.72,37.85 15.87,40 15.88,40.01 16,40.13 16,44.45 18.54,44.45
N21813 on BOTTOM (solid shape): 31.24,41.15 31.37,41.02 31.37,40 31.93,40 31.93,39.38 33.54,37.77 35.38,37.77 35.38,37.77 36.58,36.58 36.58,33.78 36.52,33.73 36.51,33.72 36.27,33.56 36.1,33.31 36.1,33.3 36.07,33.27 33.27,33.27 32.77,33.78 32.77,37.08 31.67,38.18 31.66,38.2 31.33,38.52 30.89,38.35 30.48,38.35 28.7,40.13 28.7,44.2 28.96,44.45 31.24,44.45
N21813 on TOP: 15.24,26.92 11.43,30.73 11.43,36.07 11.68,36.07 12.45,36.83 12.45,37.85 12.7,38.1 14.22,38.1 14.48,37.85 14.48,34.54 15.24,33.78 16.26,33.78 16.51,33.53 16.51,32.26 18.03,30.73 29.21,30.73 31.24,32.77 31.24,33.78 31.5,34.04 33.53,34.04 33.78,34.29 33.78,35.56 35.05,36.83 36.83,36.83 36.83,30.48 33.27,26.92
N23844 on TOP (solid shape): 24.26,6.98 24.13,6.86 22.35,6.86 21.59,7.62 21.59,9.91 22.35,10.67 24.26,10.67
N23844 on BOTTOM (solid shape): 26.29,9.27 26.29,0.63 26.16,0.51 23.88,0.51 23.88,0.63 24,0.63 24,6.4 23.42,6.99 22.15,6.99 21.72,7.42 21.72,10.36 22.15,10.79 22.4,10.79 22.53,10.92 24.64,10.92
N23930 on TOP (solid shape): 38.86,21.59 38.86,18.54 38.35,18.03 36.81,18.03 35.59,19.25 35.39,19.45 34.03,19.45 33.72,19.45 33.68,19.46 33.38,19.46 32.51,20.32 32.51,20.83 32.89,20.83 32.9,20.73 32.91,20.64 32.93,20.54 32.96,20.45 32.99,20.36 33.03,20.28 33.08,20.19 33.14,20.12 33.2,20.04 33.27,19.98 33.34,19.92 33.42,19.86 33.51,19.81 33.59,19.77 33.68,19.74 33.77,19.71 33.87,19.7 33.96,19.69 34.06,19.68 34.16,19.69 34.25,19.7 34.34,19.73 34.43,19.76 34.52,19.79 34.61,19.84 34.69,19.89 34.77,19.95 34.84,20.01 34.9,20.08 34.96,20.16 35.01,20.24 35.06,20.32 36.19,20.32 36.2,20.22 36.21,20.13 36.23,20.04 36.26,19.94 36.29,19.85 36.34,19.77 36.39,19.69 36.44,19.61 36.5,19.54 36.57,19.47 36.65,19.41 36.73,19.35 36.81,19.31 36.89,19.27 36.98,19.23 37.08,19.21 37.17,19.19 37.27,19.18 37.36,19.18 37.46,19.18 37.55,19.2 37.65,19.22 37.74,19.25 37.83,19.28 37.91,19.33 37.99,19.38 38.07,19.44 38.14,19.5 38.2,19.57 38.26,19.65 38.32,19.73 38.36,19.81 38.4,19.9 38.43,19.99 38.46,20.08 38.47,20.18 38.48,20.27 38.48,20.37 38.47,20.46 38.46,20.56 38.43,20.65 38.4,20.74 38.36,20.83 38.32,20.91 38.26,20.99 38.2,21.07 38.14,21.14 38.07,21.2 37.99,21.26 37.91,21.31 37.83,21.36 37.74,21.39 37.65,21.42 37.55,21.44 37.46,21.46 37.36,21.46 37.27,21.46 37.17,21.45 37.08,21.43 36.98,21.41 36.89,21.37 36.81,21.33 36.73,21.29 36.65,21.23 36.57,21.17 36.5,21.1 36.44,21.03 36.39,20.95 36.34,20.87 36.29,20.79 36.26,20.7 36.23,20.6 36.21,20.51 36.2,20.42 36.19,20.32 35.06,20.32 35.1,20.41 35.13,20.5 35.16,20.59 35.17,20.68 35.18,20.78 35.18,20.88 35.17,20.97 35.16,21.07 35.13,21.16 35.1,21.25 35.06,21.34 35.01,21.42 34.96,21.5 34.9,21.58 34.84,21.65 34.77,21.71 34.69,21.77 34.61,21.82 34.52,21.86 34.43,21.9 34.34,21.93 34.25,21.95 34.16,21.97 34.06,21.97 33.96,21.97 33.87,21.96 33.77,21.94 33.68,21.92 33.59,21.88 33.51,21.84 33.42,21.79 33.34,21.74 33.27,21.68 33.2,21.61 33.14,21.54 33.08,21.46 33.03,21.38 32.99,21.29 32.96,21.2 32.93,21.11 32.91,21.02 32.9,20.92 32.89,20.83 32.51,20.83 32.51,22.1 32.77,22.35 38.1,22.35
N23930 on BOTTOM (solid shape): 29.46,13.21 29.46,11.43 28.96,10.92 28.96,0.76 26.42,0.76 26.42,10.67 26.16,10.92 26.16,13.46 26.67,13.97 28.7,13.97
N23944 on TOP (solid shape): 26.16,13.46 26.16,10.67 26.8,10.03 26.8,6.81 27.56,6.04 27.56,0.76 25.15,0.76 25.15,6.1 24.41,6.83 24.4,6.89 24.44,6.92 24.51,6.92 24.51,10.86 24.38,10.86 24.38,10.92 23.37,10.92 22.86,11.43 22.86,13.72 23.37,14.22 25.4,14.22
N23948 on BOTTOM (solid shape): 22.86,13.46 22.86,11.43 22.35,10.92 22.1,10.92 21.59,10.41 21.59,7.37 22.1,6.86 23.37,6.86 23.88,6.35 23.88,0.76 21.46,0.76 21.46,4.88 21.34,5.01 21.34,5.33 20.83,5.84 20.5,5.84 19.61,6.73 19.43,6.73 19.3,6.86 19.3,13.46 20.07,14.22 22.1,14.22
N23952 on TOP (solid shape): 32.77,13.46 32.77,11.68 32,10.92 32,5.84 32.77,5.08 32.77,0.76 30.35,0.76 30.35,5.21 30.02,5.21 29.59,5.64 29.59,10.47 29.46,10.59 29.46,13.21 30.48,14.22 32,14.22
N24042 on BOTTOM (solid shape): 36.32,10.41 36.32,7.11 34.16,4.95 34.16,4.95 34.04,4.83 34.04,0.25 31.5,0.25 31.5,5.33 35.31,9.14 35.31,10.67 36.07,10.67
N24042 on BOTTOM (solid shape): 17.27,11.18 17.27,7.87 18.37,6.77 18.37,6.76 18.71,6.43 19.15,6.6 19.56,6.6 21.34,4.83 21.34,0.76 21.08,0.51 18.8,0.51 18.8,3.81 18.67,3.94 18.67,4.95 18.11,4.95 18.11,5.58 16.5,7.19 14.66,7.19 14.66,7.19 13.46,8.38 13.46,11.18 13.52,11.23 13.77,11.4 13.94,11.65 13.94,11.66 13.97,11.68 16.76,11.68
N24042 on TOP: 34.8,18.03 38.61,14.22 38.61,8.89 38.35,8.89 37.59,8.13 37.59,7.11 37.34,6.86 35.81,6.86 35.56,7.11 35.56,10.41 34.8,11.18 33.78,11.18 33.53,11.43 33.53,12.7 32,14.22 20.83,14.22 18.8,12.19 18.8,11.18 18.54,10.92 16.51,10.92 16.26,10.67 16.26,9.4 14.99,8.13 13.21,8.13 13.21,14.48 16.76,18.03
N26771 on TOP (solid shape): 22.35,38.86 23.11,38.1 23.11,34.54 22.86,34.29 20.83,34.29 20.57,34.54 20.57,39.37 20.07,39.88 19.81,39.88 19.81,44.2 22.35,44.2
N26877 on TOP (solid shape): 29.46,10.41 29.46,5.59 29.97,5.08 30.23,5.08 30.23,0.76 27.69,0.76 27.69,6.1 26.92,6.86 26.92,10.41 27.18,10.67 29.21,10.67
